# Allegro board MOTION_DETECTOR.brd
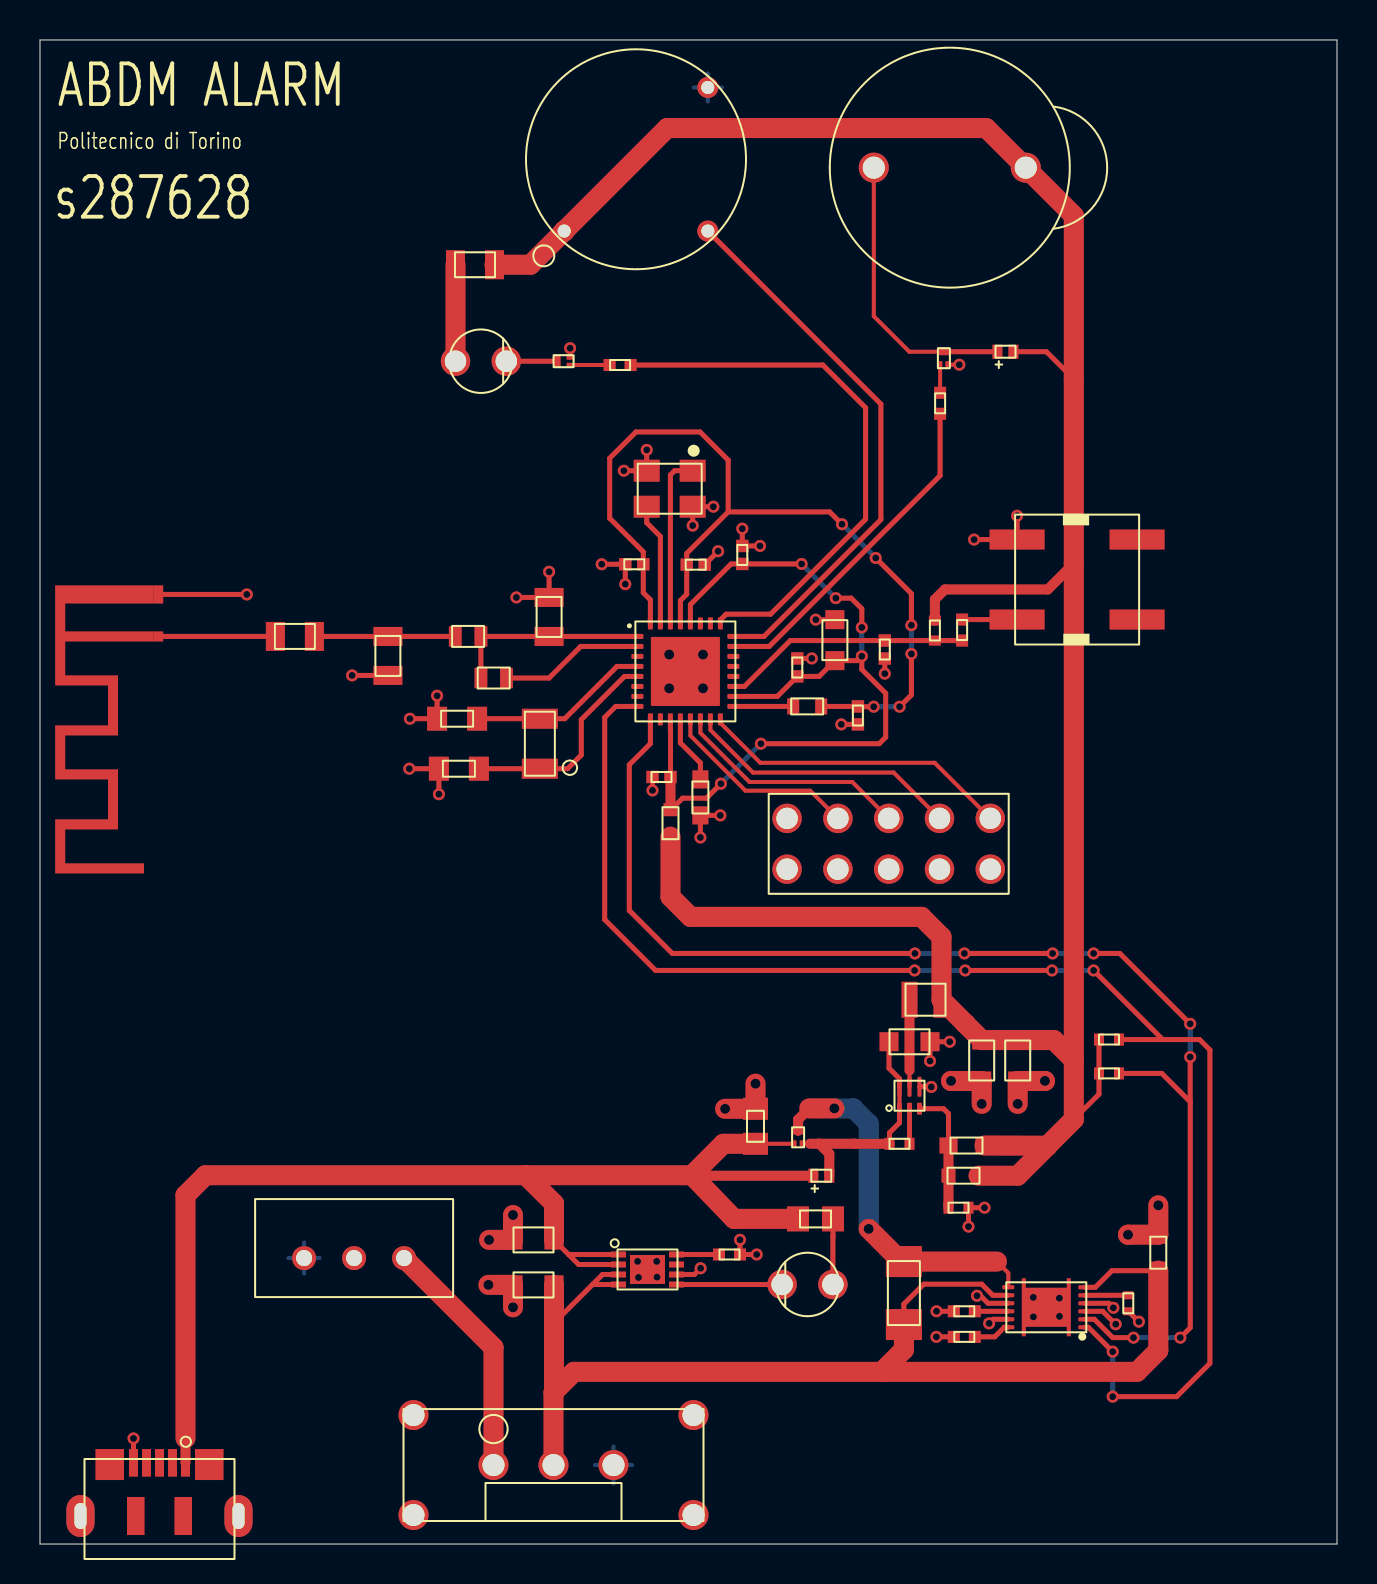
[diagram p0: board, top side]
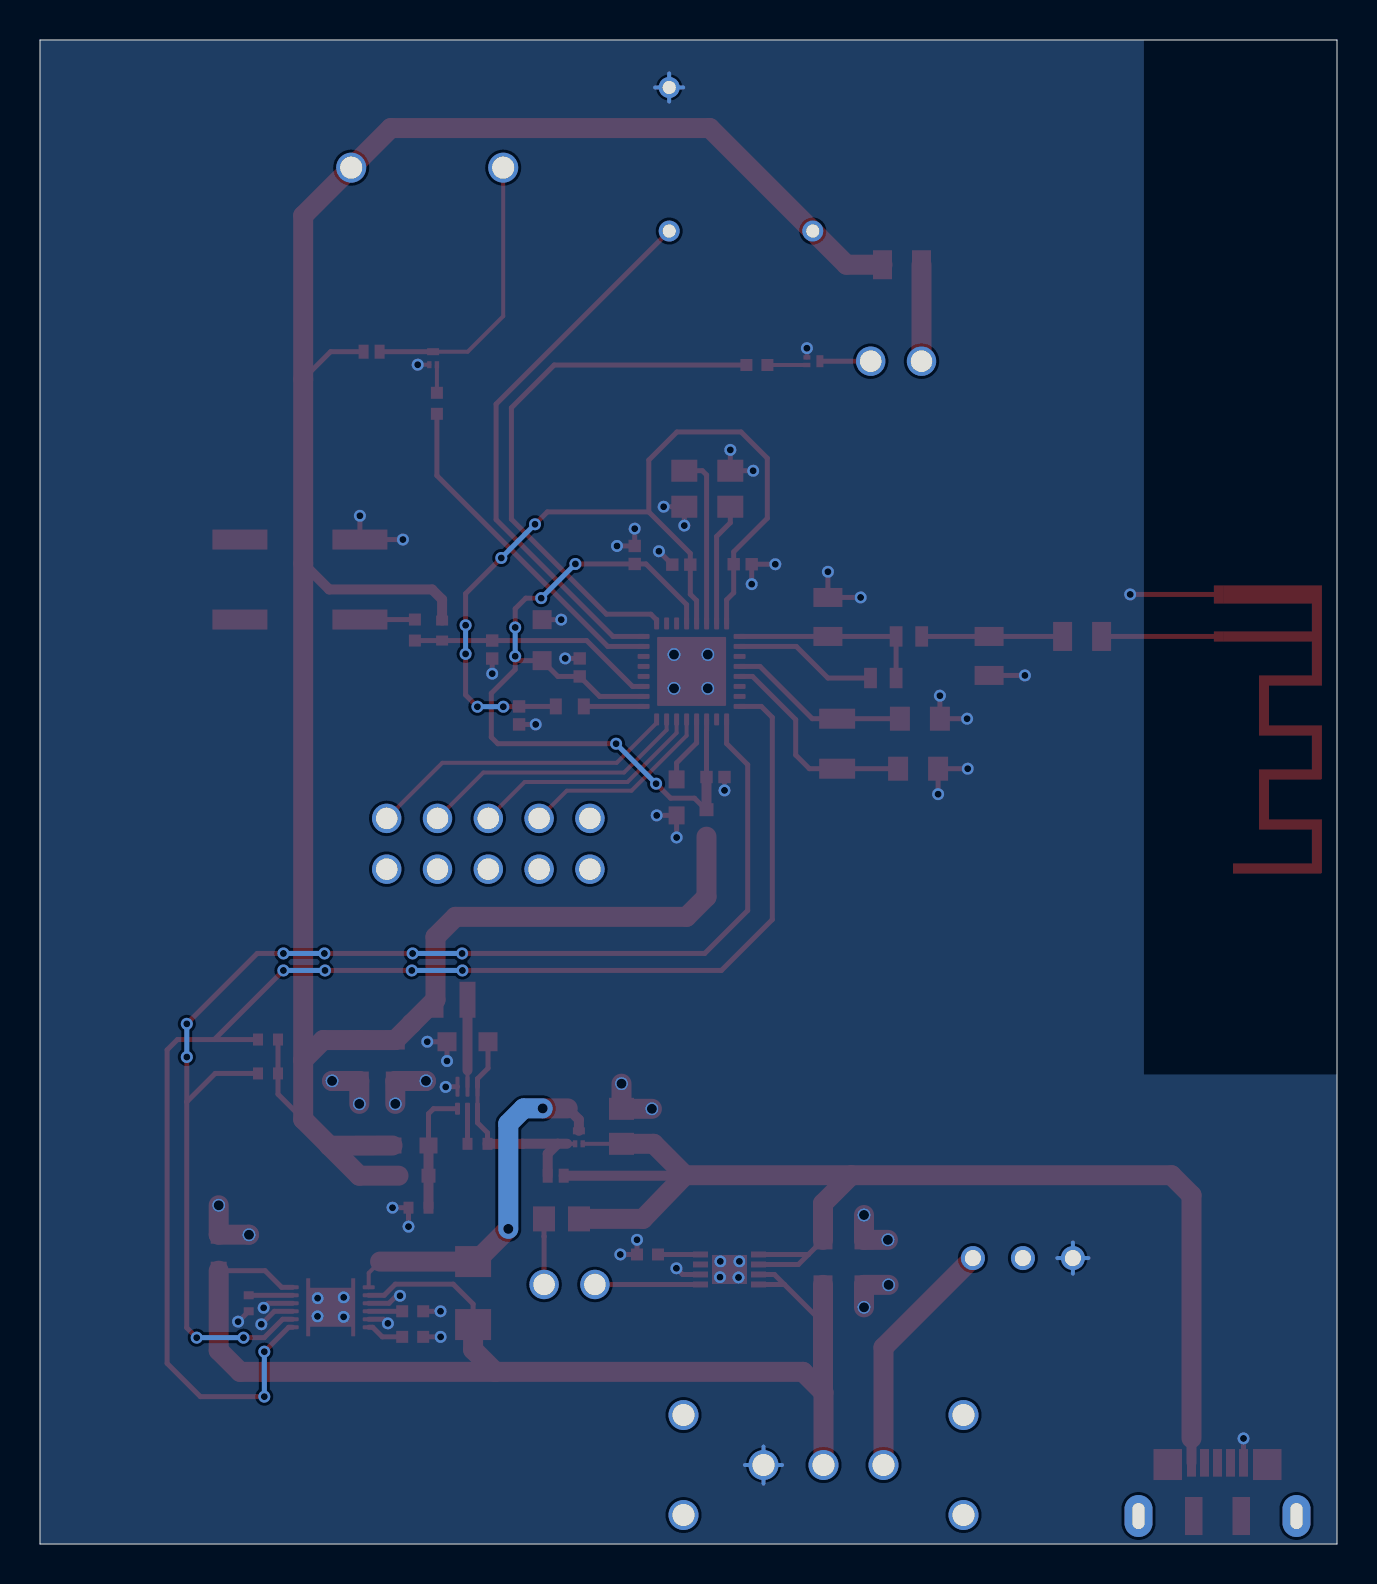
[diagram p1: board, bottom side, seen from below]

Outline 64.85 x 75.22 mm; copper layers: TOP, BOTTOM. Coordinates in mm from the lower left corner of the outline.
Outline path: 0,75.22 64.85,75.22 64.85,0 0,0 0,75.22

## Design rules (mm)
constraint set DEFAULT: 

## Placement (name value [footprint] x y rotation side)
C1  C_4.7uF  [GRM21BR71A475ME51K]  24.68 15.21 0 top
C2  C_4.7uF  [GRM21BR71A475ME51K]  24.68 12.96 0 top
C3  C_470nF  [GRM155R61A474ME15D]  54.41 12.04 90 top
C4  C_1uF  [CC0603KRX5R5BB105]  55.91 14.57 270 top
C5  C_12pF_highQ  [VJ0402D120GXCAJ]  12.75 45.39 180 top
C6  C_1200pF_highQ  [VJ0805D122KXXAJ]  25.46 46.37 270 top
C7  C_1200pF_highQ  [VJ0805D122KXXAJ]  17.39 44.41 90 top
C8  C_12pF  [GRM1885C1H120JA01J]  20.95 38.77 0 top
C9  C_12pF  [GRM1885C1H120JA01J]  20.86 41.27 0 top
C10  C_1uF  [CC0603KRX5R5BB105]  33.02 37.34 90 top
C11  C_100nF  [C0402C104M8RAC7411]  31.07 38.36 0 top
C12  C_100nF  [C0402C104M8RAC7411]  35.11 49.47 270 top
C13  C_10uF  [GRM21BR71A106MA73K]  39.75 45.2 270 top
C14  C_100nF  [C0402C104M8RAC7411]  37.86 43.84 270 top
C15  C_100nF  [C0402C104M8RAC7411]  40.89 41.44 90 top
C16  C_100nF  [C0402C104M8RAC7411]  32.78 48.98 180 top
C17  C_100nF  [C0402C104M8RAC7411]  29.71 49 0 top
C18  C_100nF  [C0402C104M8RAC7411]  42.24 44.73 90 top
C19  C_10uF  [GRM21BR71A106MA73K]  47.08 24.18 90 top
C20  C_10uF  [GRM21BR71A106MA73K]  48.89 24.18 90 top
C21  C_120pF  [CL10C121JB8NNNC]  46.17 18.42 0 top
C22  C_4.7uF  [GRM21BR71A475ME51K]  43.47 25.12 180 top
D1  LED_R_1.7mV_1mA  [HLMPK150]  38.38 12.98 180 top
D2  Schottky_BAT32LSQYL  [BAT32LSQYL]  39.06 18.42 0 top
D3  Diode_BAS16LD315  [BAS16LD315]  48.27 59.63 0 top
D4  LED_R_1.7mV_1mA  [HLMPK150]  22.04 59.16 0 top
FL1  Ferrite_BLM18HE152SN1  [BLM18HE152SN1D]  31.53 36.05 90 top
L1  L_15nH_highQ  [IMC0603ER15NJ01]  22.68 43.31 180 top
L2  L_2nH_highQ  [IMC0603ER2N0S01]  21.41 45.39 180 top
L3  L_10uH  [MLF1608E100MTD00]  38.36 41.89 0 top
L4  L_470nH  [DFE201610E]  44.28 27.22 0 top
M1  nMOS_SSM3K16CTL3F  [SSM3K16CT]  37.91 20.34 180 top
M2  nMOS_SSM3K16CTL3F  [SSM3K16CT]  45.2 59.3 180 top
M3  nMOS_SSM3K16CTL3F  [SSM3K16CT]  26.18 59.16 270 top
R1  R_3300_1%  [CRCW06033K30FKEA]  38.78 16.26 180 top
R2  R_1k_5%  [CRCW04021K00JNED]  34.47 14.48 180 top
R3  R_10m_1%  [MFSA1206R0100FCM]  43.2 12.55 270 top
R4  R_5k_1%  [RC0402FR075KL]  53.45 25.23 180 top
R5  R_5k_1%  [RC0402FR075KL]  53.45 23.54 180 top
R6  R_100k_5%  [CRCW0603100KJNEA]  35.78 20.89 270 top
R7  R_1M_1%  [CRCW04021M00FKEE]  46.22 10.36 180 top
R8  R_1M_1%  [CRCW04021M00FKEE]  46.22 11.64 0 top
R9  R_1600_5%  [CRCW08051K60JNEA]  21.75 63.98 0 top
R10  R_50k_1%  [CRCW040250K0FKED]  29 58.96 180 top
R11  R_50k_1%  [CRCW040250K0FKED]  45 57.05 90 top
R12  R_100k_5%  [RT0402FRE07100KL]  44.75 45.69 90 top
R13  R_1k_5%  [CRCW04021K00JNED]  46.11 45.71 270 top
R14  R_453k_0.1%  [RT0603BRD07453KL]  46.33 19.93 0 top
R15  R_100k_1%  [RT0402FRE07100KL]  42.97 20.02 180 top
R16  R_100k_1%  [RT0402FRE07100KL]  45.92 16.82 180 top
SW1  SW_SK12F17G7  [SK12F17G7]  25.68 3.95 0 top
U1  MicroUSB_1051640001  [1051640001]  5.98 1.75 180 top
U2  BatCharger_MCP73832T2ATIMC  [MCP73832T2ATIMC]  30.38 13.73 0 top
U3  CON3_22035035  [22035035]  15.71 14.3 0 top
U4  BatteryGauge_BQ27411DRZTG1A  [BQ27411DRZTG1A]  50.31 11.84 180 top
U5  uC_CC2640F128RHBR  [FOOTPRINT_CC2640F128RHBR]  32.27 43.64 90 top
U6  patch_antenna_50ohm  [PATCH_ANTENNA_50OHM]  5.66 48.44 90 top
U7  Buzzer_AI1223TWT3V2R  [AI1223TWT3V2R]  45.49 68.83 270 top
U8  CON10_M209720546  [M209720546]  42.44 35.02 0 top
U9  pushbutton_EVPBV2C3L000  [EVPBV2C3L000]  51.86 48.23 180 top
U10  PIR_EKMC1607112  [EKMC1607112]  29.8 69.25 90 top
U11  Buck_TPS62824DMQR  [TPS62824DMQR]  43.47 22.42 90 top
Y1  XTAL_32768_SC32S7PF20PPM  [SC32S7PF20PPM]  24.99 40.02 90 top
Y2  XTAL_24M_ECS240833AGNTR3  [ECS240833AGNTR]  31.49 52.78 180 top

## Library data of the parts
C1 C2 C22 = C_4700nF_GRM21BR71A475ME51K
C3 = C_470nF_GRM155R61A474ME15D
C4 C10 = C_1uF_CC0603KRX5R5BB105
C5 = C_12pF_VJ0402D120GXCAJ_highQ
C6 C7 = C_1200pF_VJ0805D122KXXAJ_highQ
C8 C9 = C_12pF_GRM1885C1H120JA01J
C11 C12 C14-C18 = C_100nF_C0402C104M8RAC7411
C13 C19 C20 = C_10uF_GRM21BR71A106MA73K
C21 = C_120pF_CL10C121JB8NNNC
D1 D4 = LED_R_HLMPK150
D2 = Schottky_BAT32LSQYL
D3 = Diode_BAS16LD315
FL1 = Ferrite_BLM18HE152SN1
L1 = L_15nH_IMC0603ER15NJ01_highQ
L2 = L_2nH_IMC0603ER2N0S01_highQ
L3 = L_10uH_MLF1608E100MTD00
L4 = L_470nH_DFE201610ER47M
M1-M3 = nMOS_SSM3K16CTL3F
R1 = R_3300_1%_CRCW06033K30FKEA
R2 R13 = R_1k_5%_CRCW04021K00JNED
R3 = R_10m_1%_MFSA1206R0100FCM
R4 R5 = R_5k_1%_RC0402FR075KL
R6 R12 = R_100k_5%_CRCW0603100KJNEA
R7 R8 = R_1M_1%_CRCW04021M00FKEE
R9 = R_1600_5%_CRCW08051K60JNEA
R10 R11 = R_50k_1%_CRCW040250K0FKED
R14 = R_453k_RT0603BRD07453KL
R15 R16 = R_100k_1%_RT0402FRE07100KL
SW1 = SW_SK12F17G7
U1 = MicroUSB_1051640001
U2 = BatteryCharger_MCP73832T2ATIMC
U3 = CON3_22035035
U4 = BatteryGauge_BQ27411DRZTG1A
U5 = uC_CC2640F128RHBR
U6 = patch_antenna_50ohm
U7 = Buzzer_AI1223TWT3V2R
U8 = CON10_M209720546
U9 = Pushbutton_EVPBV2C3L000
U10 = PIRsensor_EKMC1607112
U11 = Buck_TPS62824DMQR
Y1 = XTAL_32768_SC32S7PF20PPM
Y2 = XTAL_24M_ECS240833AGNTR3

## Footprints (pads in the part's own frame, mm; a bottom-side part is the same pattern mirrored in y, then rotated)
22035035
  round 1.2 hole 0.8: 1(-2.5,0) 2(0,0) 3(2.5,0)
1051640001
  rect 0.45x1.38 smd: 1(-1.3,-2.31) 2(-0.65,-2.31) 3(0,-2.31) 4(0.65,-2.31) 5(1.3,-2.31)
  oval 1.4x2.1 hole 0.6x1.3: 6(-3.95,0.35) 7(3.95,0.35)
  rect 1.425x1.55 smd: 8(-2.487,-2.225) 9(2.487,-2.225)
  rect 0.875x1.9 smd: 10(-1.188,0.35) 11(1.188,0.35)
AI1223TWT3V2R
  round 1.5 hole 1.1: 1(0,3.8) 2(0,-3.8)
BAS16LD315
  rect 0.5x0.7 smd: 1(-0.4,0) 2(0.4,0)
BAT32LSQYL
  rect 0.5x0.7 smd: 1(-0.4,0) 2(0.4,0)
BLM18HE152SN1D
  rect 0.65x0.7 smd: 1(-0.675,0) 2(0.675,0)
BQ27411DRZTG1A
  rrect 0.6x0.2 smd: 1(-1.9,1) 2(-1.9,0.6) 3(-1.9,0.2) 4(-1.9,-0.2) 5(-1.9,-0.6) 6(-1.9,-1) 7(1.9,-1) 8(1.9,-0.6) 9(1.9,-0.2) 10(1.9,0.2) 11(1.9,0.6) 12(1.9,1)
  custom 2.45x2.9 smd: 13(0,0)
C0402C104M8RAC7411
  rect 0.62x0.62 smd: 1(-0.45,0) 2(0.45,0)
CC0603KRX5R5BB105
  rect 0.9x0.8 smd: 1(-0.9,0) 2(0.9,0)
CL10C121JB8NNNC
  rect 0.7x0.7 smd: 1(-0.75,0) 2(0.75,0)
CRCW04021K00JNED
  rect 0.6x0.6 smd: 1(-0.525,0) 2(0.525,0)
CRCW04021M00FKEE
  rect 0.6x0.6 smd: 1(-0.525,0) 2(0.525,0)
CRCW06033K30FKEA
  rect 1.1x1.25 smd: 1(-0.875,0) 2(0.875,0)
CRCW08051K60JNEA
  rect 0.95x1.45 smd: 1(-0.975,0) 2(0.975,0)
CRCW040250K0FKED
  rect 0.6x0.6 smd: 1(-0.525,0) 2(0.525,0)
CRCW0603100KJNEA
  rect 1.1x1.25 smd: 1(-0.875,0) 2(0.875,0)
DFE201610E
  rect 0.8x1.8 smd: 1(-0.8,0) 2(0.8,0)
ECS240833AGNTR
  rect 1.3x1.1 smd: 1(-1.15,-0.9) 2(1.15,-0.9) 3(1.15,0.9) 4(-1.15,0.9)
EKMC1607112
  round 1.05 hole 0.65: 1(-3.59,3.59) 2(-3.59,-3.59) 3(3.59,-3.59)
EVPBV2C3L000
  rect 2.75x1 smd: 1(-3,2) 2(3,2) 3(-3,-2) 4(3,-2)
FOOTPRINT_CC2640F128RHBR
  rrect 0.25x0.6 smd: 1(1.75,2.4) 2(1.25,2.4) 3(0.75,2.4) 4(0.25,2.4) 5(-0.25,2.4) 6(-0.75,2.4) 7(-1.25,2.4) 8(-1.75,2.4) 17(-1.75,-2.4) 18(-1.25,-2.4) 19(-0.75,-2.4) 20(-0.25,-2.4) 21(0.25,-2.4) 22(0.75,-2.4) 23(1.25,-2.4) 24(1.75,-2.4)
  rrect 0.6x0.25 smd: 9(-2.4,1.75) 10(-2.4,1.25) 11(-2.4,0.75) 12(-2.4,0.25) 13(-2.4,-0.25) 14(-2.4,-0.75) 15(-2.4,-1.25) 16(-2.4,-1.75) 25(2.4,-1.75) 26(2.4,-1.25) 27(2.4,-0.75) 28(2.4,-0.25) 29(2.4,0.25) 30(2.4,0.75) 31(2.4,1.25) 32(2.4,1.75)
  rrect 3.45x3.45 smd: 33(0,0)
GRM21BR71A106MA73K
  rect 0.95x0.95 smd: 1(-1.025,0) 2(1.025,0)
GRM21BR71A475ME51K
  rect 0.95x0.95 smd: 1(-1.025,0) 2(1.025,0)
GRM155R61A474ME15D
  rect 0.4x0.5 smd: 1(-0.4,0) 2(0.4,0)
GRM1885C1H120JA01J
  rect 1x1.2 smd: 1(-1,0) 2(1,0)
HLMPK150
  round 1.47 hole 1.07: 1(-1.27,0) 2(1.27,0)
IMC0603ER2N0S01
  rect 0.64x1.02 smd: 1(-0.64,0) 2(0.64,0)
IMC0603ER15NJ01
  rect 0.64x1.02 smd: 1(-0.64,0) 2(0.64,0)
M209720546
  round 1.47 hole 1.07: 1(-5.08,1.27) 2(-2.54,1.27) 3(0,1.27) 4(2.54,1.27) 5(5.08,1.27) 6(-5.08,-1.27) 7(-2.54,-1.27) 8(0,-1.27) 9(2.54,-1.27) 10(5.08,-1.27)
MCP73832T2ATIMC
  rect 0.75x0.3 smd: 1(-1.45,0.75) 2(-1.45,0.25) 3(-1.45,-0.25) 4(-1.45,-0.75) 5(1.45,-0.75) 6(1.45,-0.25) 7(1.45,0.25) 8(1.45,0.75)
  rect 1.75x1.45 smd: 9(0,0)
MFSA1206R0100FCM
  rect 1.55x1.8 smd: 1(-1.575,0) 2(1.575,0)
MLF1608E100MTD00
  rect 0.6x0.8 smd: 1(-0.7,0) 2(0.7,0)
PATCH_ANTENNA_50OHM
  rect 0.9x0.5 smd: 1(-0.95,-0.25)
  rect 0.5x0.5 smd: 2(-3.05,-0.25)
RC0402FR075KL
  rect 0.5x0.6 smd: 1(-0.5,0) 2(0.5,0)
RT0402FRE07100KL
  rect 0.5x0.6 smd: 1(-0.5,0) 2(0.5,0)
RT0603BRD07453KL
  rect 0.9x0.8 smd: 1(-0.9,0) 2(0.9,0)
SC32S7PF20PPM
  rect 1x1.8 smd: 1(-1.25,0) 2(1.25,0)
SK12F17G7
  round 1.5 hole 1.1: 1(-3,0) 2(0,0) 3(3,0) 4(-7,2.5) 5(7,2.5) 6(-7,-2.5) 7(7,-2.5)
SSM3K16CT
  rect 0.22x0.35 smd: 1(0.19,0.325) 2(-0.19,0.325)
  rect 0.6x0.35 smd: 3(0,-0.325)
TPS62824DMQR
  rrect 0.6x0.25 smd: 1(-0.65,0.5) 2(-0.65,0) 3(-0.65,-0.5)
  rrect 1x0.2 smd: 4(0.45,-0.5) 5(0.45,0) 6(0.45,0.5)
VJ0402D120GXCAJ
  rect 0.95x1.45 smd: 1(-0.975,0) 2(0.975,0)
VJ0805D122KXXAJ
  rect 0.95x1.45 smd: 1(-0.975,0) 2(0.975,0)

## Nets
3.3V: C19.2 C20.2 C21.2 D3.2(C) FL1.1 L4.2 R4.2 R5.2 R9.2 R12.2 R14.2 U7.1(P) U10.1(VDD)
GND: C1.1 C2.1 C3.1 C4.1 C6.1 C7.1 C8.1 C9.1 C10.1 C11.1 C12.1 C13.1 C14.1 C15.1 C16.1 C17.1 C18.1 C19.1 C20.1 C22.1 M2.2 M3.2 R2.1 R6.1 R7.2 R8.1 R16.1 SW1.3 U1.5 U2.6(VSS) U2.9 U3.1 U4.3(VSS) U4.4 U4.9 U4.11 U4.13 U5.33 U6.1(GND) U9.4 U10.3 U11.4 Y2.2 Y2.4
VBAT: M1.3(S) R3.1 U4.7
VBAT_RAW: C2.2 C4.2 R3.2 SW1.2 U2.3 U2.4 U4.6 U4.8
VDDR: C15.2 C16.2 C17.2 L3.2 U5.29 U5.32
VDDS: C11.2 C12.2 C13.2 C14.2 FL1.2 U5.11 U5.18 U5.28
ANT_FEED: C5.1 C7.2 L2.2
ANTENNA: C5.2 U6.2
BAT_STAT: D1.2(C) U2.5
BATTERY: SW1.1(P) U3.3
BCK_FB: C21.1 R14.1 R16.2 U11.3
BCK_PG: R15.1 U11.2
BCK_SW: L4.1 U11.5
BUZ: R11.1 U5.23
BUZZ_DRV_MOSDRAIN: D3.1 M2.3(S) U7.2
BUZZ_DRV_MOSGATE: M2.1 R11.2
CRG_PROG: R2.2 U2.8
DCDC_SW: L3.1 U5.17
DCOUPL: C10.2 U5.12
FG_SCK: R5.1 U4.2 U5.9
FG_SDA: R4.1 U4.1 U5.8
JTAG_TCKC: U5.14 U8.3
JTAG_TDI: U5.16 U8.5
JTAG_TDO: U5.15 U8.4
JTAG_TMSC: U5.13 U8.2
ONOFF_LED: R10.1 U5.25
ONOFFLED_DRV_DRAIN: D4.2(C) M3.3(S)
ONOFFLED_DRV_GATE: M3.1 R10.2
ONOFFLED_DRV_RES: D4.1 R9.1
PIR: U5.24 U10.2
RF_N: L1.1 U5.2
RF_P: C6.2 L1.2 L2.1 U5.1
RSTN: C18.2 R12.1 R13.2 U5.19
V_SOURCE: C22.2 D2.2 M1.2 R15.2 U11.1 U11.6(VIN)
VUSB: C1.2 D2.1 M1.1 R1.2 R6.2 U1.1(VDD_USB) U2.1 U2.2
X24M_N: U5.30 Y2.1
X24M_P: U5.31 Y2.3(OUT_IN)
X32K_Q1: C9.2 U5.4 Y1.2
X32K_Q2: C8.2 U5.5(X32K_Q2) Y1.1
N18214: D1.1 R1.1
N23265: R7.1 U4.12
N23278: C3.2 U4.5
N46613: R13.1 U9.2(B2)
N59465: R8.2 U4.10

Pads without a net: SW1 4 5 6 7; U1 2 3 4 6 7 8 9 10 11; U2 7; U3 2; U5 3 6 7 10 20 21 22 26 27; U8 1 6 7 8 9 10; U9 1 3

## Via types
v1: diameter 0.6, hole 0.35, TOP to BOTTOM, 78 vias
v2: diameter 0.65, hole 0.5, TOP to BOTTOM, 18 vias

## Routing (per net, layer and track width the routed paths; a pad name or vN(x,y) marks a point on that pad's centre or on a via; arc(x,y) is an arc through that point)
3.3V: length 133.2
  TOP w0.25: 51.69,21.24 52.95,22.5 R5.2 R4.2 ; 51.69,58.26 50.32,59.63 D3.2
  TOP w0.5: 51.69,49.04 50.39,47.74 45.25,47.74 44.75,47.24 R12.2
  TOP w1: C21.2 48.89,18.42 50.39,19.92 ; 51.69,24.2 50.69,25.2 C20.2 C19.2 46.28,26.02 46.28,26.02 L4.2 45.08,30.37 44.08,31.37 32.53,31.37 31.53,32.37 31.53,35.38 ; 51.69,24.2 51.69,21.24 50.39,19.93 50.39,19.92 ; 51.69,24.2 51.69,66.43 U7.1 47.31,70.81 31.36,70.81 U10.1 24.53,63.98 R9.2 ; 50.39,19.92 R14.2
GND: length 76.3
  TOP w0.2: M2.2 v1(45.97,58.98) ; M3.2 v1(26.5,59.8)
  TOP w0.25: v1(19.86,42.43) C9.1 v1(18.5,41.27) ; v1(53.67,11.81) 53.44,12.04 U4.4 ; U4.3 53.13,11.64 53.78,10.99 v1(53.78,10.99) ; v1(47.22,16.82) R16.1 v1(46.42,15.87) ; v1(35,15.21) R2.1 v1(35.83,14.48) ; U2.6 32.72,13.48 v1(33.03,13.79) ; v1(23.82,47.34) C6.1 v1(25.46,48.62) ; v1(44.5,24.16) C22.1 v1(45.49,25.12) ; C7.1 v1(15.61,43.44) ; U4.9 47.4,12.04 47.03,12.42 v1(46.85,12.42) ; v1(30.33,54.72) Y2.2 v1(29.19,53.68) ; R8.1 v1(44.83,11.64) ; C16.1 v1(33.91,49.65) ; v1(28.08,49) C17.1 v1(29.27,48.01) ; C14.1 v1(38.59,44.29) ; U6.1 v1(10.34,47.49) ; v1(47.46,11.03) 47.66,11.24 U4.11 ; R7.2 v1(44.82,10.36) ; v1(48.86,51.43) U9.4 v1(46.7,50.23) ; v1(33.67,51.88) Y2.4 v1(32.64,50.94) ; v1(34.02,36.44) C10.1 v1(33.02,35.34) ; C13.1 v1(38.79,46.23) ; U11.4 44.56,22.87 v1(44.56,22.86) ; v1(54.94,11.12) 54.94,11.12 C3.1 ; 42.24,44.29 v1(42.24,43.53) ; v1(36,49.91) 35.11,49.91 v1(35.11,50.78) ; C15.1 v1(40.06,40.99) ; U1.5 v1(4.68,5.28) ; v1(19.95,37.5) C8.1 v1(18.46,38.77) ; C11.1 v1(30.63,37.69)
  TOP w1: v2(35.78,23.02) R6.1 v2(34.25,21.77) ; v2(23.65,11.84) C2.1 v2(22.42,12.96) ; v2(54.4,15.47) 54.41,15.47 C4.1 v2(55.91,16.94) ; v2(45.55,23.16) 45.56,23.16 C19.1 v2(47.08,22.01) ; v2(23.65,16.45) C1.1 v2(22.45,15.21) ; v2(50.25,23.16) 50.24,23.16 C20.1 v2(48.89,22.01)
  BOTTOM w0.2: 27.75,3.95 SW1.3 ; SW1.3 29.6,3.95 ; SW1.3 28.68,4.88 ; SW1.3 28.68,3.02 ; U3.1 13.98,14.3 ; U3.1 13.21,15.08 ; U3.1 12.43,14.3 ; U3.1 13.21,13.52 ; U10.3 33.39,73.55 ; U10.3 33.39,72.14 ; U10.3 32.69,72.84 ; U10.3 34.09,72.84
  vias: v1(29.88,14.13) v1(29.93,13.33) v1(30.83,14.13) v1(30.85,13.35) v1(49.67,12.33) v1(49.67,11.36) v1(50.97,12.29) v1(50.97,11.38) v2(31.46,44.48) v2(31.46,42.79) v2(33.15,44.48) v2(33.15,42.79)
VBAT: length 18.5
  TOP w0.2: 47.84,14.12 48.42,13.55 U4.7
  TOP w0.5: 37.91,20.66 37.91,21.23 38.47,21.79
  TOP w1: 38.47,21.79 v2(39.72,21.79) ; 47.84,14.12 R3.1 43.07,14.12 v2(41.43,15.76)
  BOTTOM w1: v2(39.72,21.79) 40.67,21.79 41.43,21.02 v2(41.43,15.76)
VBAT_RAW: length 63.4
  TOP w0.25: 27.63,12.98 28.13,13.48 U2.3 ; 27.63,12.98 U2.4 ; 27.63,12.98 25.7,11.05 ; U4.8 47.64,12.44 47.08,12.99 44.19,12.99 43.2,12 R3.2 ; U4.6 52.77,12.84 53.6,13.67 C4.2
  TOP w1: 25.7,7.61 C2.2 ; 25.7,7.61 25.68,7.58 SW1.2 ; 25.7,7.61 26.7,8.61 42.08,8.61 ; 42.08,8.61 43.2,9.72 R3.2 ; 42.08,8.61 54.84,8.61 55.91,9.68 C4.2
VDDR: length 46
  TOP w0.25: v1(40.1,51) 39.48,51.62 34.41,51.62 ; 34.41,51.62 32.33,49.54 C16.2 32.33,47.5 32.02,47.19 U5.29 ; 34.41,51.62 34.41,54.21 33,55.62 29.79,55.62 28.49,54.3 28.49,51.3 30.17,49.62 C17.2 30.17,47.58 30.52,47.22 U5.32 ; v1(41.78,49.32) 43.57,47.53 v1(43.57,45.95) ; v1(41.69,41.88) 40.91,41.88 C15.2 39.06,41.89 ; v1(43.57,44.52) 43.57,42.47 v1(42.98,41.88)
  BOTTOM w0.25: v1(42.98,41.88) v1(41.69,41.88) ; v1(43.57,45.95) v1(43.57,44.52) ; v1(40.1,51) v1(41.78,49.32)
VDDS: length 42.2
  TOP w0.25: v1(36.05,40.02) 41.96,40.02 42.28,40.35 42.28,42.55 41.09,43.74 v1(41.09,44.4) 40.87,44.18 C13.2 38.95,43.39 C14.2 36.86,42.39 U5.18 ; v1(34.05,38.02) 33.32,37.3 32.12,37.3 31.55,36.73 FL1.2 ; U5.28 32.52,46.98 34.55,49.02 C12.2 v1(38.08,49.02) ; v1(41.09,45.84) 41.09,46.77 40.56,47.3 v1(39.79,47.3) ; C11.2 31.53,40.68 31.52,40.69 U5.11
  TOP w0.5: FL1.2 C11.2
  BOTTOM w0.25: v1(38.08,49.02) v1(39.79,47.3) ; v1(41.09,45.84) v1(41.09,44.4) ; v1(36.05,40.02) v1(34.05,38.02)
ANT_FEED: length 7
  TOP w0.25: L2.2 C7.2 C5.1
ANTENNA: length 5.9
  TOP w0.25: C5.2 U6.2
BAT_STAT: length 5.3
  TOP w0.25: D1.2 U2.5
BATTERY: length 12.2
  TOP w1: SW1.1 22.68,9.83 U3.3
BCK_FB: length 6.3
  TOP w0.25: U11.3 45.17,21.77 45.42,21.52 R14.1
  TOP w0.5: R16.2 C21.1 R14.1
BCK_PG: length 1.8
  TOP w0.25: U11.2 R15.1
BCK_SW: length 4.3
  TOP w0.2: U11.5 43.47,23.69
  TOP w0.5: 43.47,23.69 L4.1
BUZ: length 17
  TOP w0.25: R11.1 45,53.44 36.46,44.89 U5.23
BUZZ_DRV_MOSDRAIN: length 14.3
  TOP w0.2: M2.3 43.47,59.63 41.69,61.41 U7.2
  TOP w0.25: D3.1 M2.3
BUZZ_DRV_MOSGATE: length 1.4
  TOP w0.2: M2.1 45,57.57
CRG_PROG: length 2.1
  TOP w0.25: U2.8 R2.2
DCDC_SW: length 3
  TOP w0.25: U5.17 L3.1
DCOUPL: length 3.4
  TOP w0.25: U5.12 32.02,40.07 33.02,39.07 C10.2
FG_SCK: length 65.6
  TOP w0.25: v1(43.75,29.54) 31.61,29.54 29.46,31.69 29.46,38.98 30.52,40.03 U5.9 ; v1(50.63,29.54) v1(46.22,29.54) ; 57.51,22.12 56.09,23.54 R5.1 ; 57.51,22.12 57.51,22.11 57.51,10.82 v1(57.02,10.32) ; 57.51,22.12 v1(57.51,24.36) ; v1(52.68,29.54) 53.99,29.54 v1(57.51,26.02) ; U4.2 52.72,11.24 53.64,10.32 v1(54.67,10.32)
  BOTTOM w0.25: v1(57.02,10.32) v1(54.67,10.32) ; v1(57.51,24.36) v1(57.51,26.02) ; v1(52.68,29.54) v1(50.63,29.54) ; v1(46.22,29.54) v1(43.75,29.54)
FG_SDA: length 72.5
  TOP w0.25: U4.1 52.42,10.84 v1(53.64,9.62) ; v1(52.68,28.69) 56.13,25.23 ; 56.13,25.23 57.98,25.23 58.49,24.71 58.49,9.03 56.83,7.37 v1(53.64,7.37) ; 56.13,25.23 R4.1 ; v1(50.6,28.69) v1(46.26,28.69) ; v1(43.73,28.69) 30.78,28.69 28.24,31.23 28.24,41.34 28.79,41.89 U5.8
  BOTTOM w0.25: v1(53.64,9.62) v1(53.64,7.37) ; v1(46.26,28.69) v1(43.73,28.69) ; v1(52.68,28.69) v1(50.6,28.69)
JTAG_TCKC: length 11.9
  TOP w0.2: U8.3 40.61,38.11 35.47,38.11 33.02,40.57 U5.14
JTAG_TDI: length 15.6
  TOP w0.2: U5.16 34.02,41.07 36.02,39.07 44.73,39.07 U8.5
JTAG_TDO: length 13.8
  TOP w0.2: U5.15 33.52,40.71 35.65,38.59 42.68,38.59 U8.4
JTAG_TMSC: length 9.9
  TOP w0.2: U5.13 32.52,40.43 35.28,37.68 38.51,37.68 U8.2
ONOFF_LED: length 27.7
  TOP w0.25: U5.25 34.02,46.22 34.31,46.5 36.53,46.5 41.28,51.26 41.28,56.82 39.14,58.96 R10.1
ONOFFLED_DRV_DRAIN: length 2.5
  TOP w0.25: M3.3 D4.2
ONOFFLED_DRV_GATE: length 2
  TOP w0.2: M3.1 R10.2
ONOFFLED_DRV_RES: length 4.8
  TOP w1: R9.1 D4.1
PIR: length 27.8
  TOP w0.25: U10.2 42.05,57.01 42.05,51.23 36.2,45.39 U5.24
RF_N: length 7.2
  TOP w0.25: L1.1 25.46,43.31 27.04,44.89 U5.2
RF_P: length 9.9
  TOP w0.25: U5.1 C6.2 L2.1 L1.2
RSTN: length 12.4
  TOP w0.25: R13.2 R12.1 C18.2 37.52,45.19 35.22,42.89 U5.19
V_SOURCE: length 11.7
  TOP w0.2: 38.5,20.02 38.49,20.02 M1.2 ; U11.6 U11.1
  TOP w0.25: R15.2 42.47,20.57 42.97,21.07 U11.1 ; U11.6 42.97,23.27 42.45,23.8 C22.2
  TOP w0.5: 38.5,20.02 38.97,20.02 ; 38.97,20.02 39.47,19.52 D2.2 ; 38.97,20.02 40.72,20.02 40.72,20.02 R15.2
VUSB: length 67.2
  TOP w0.2: M1.1 R6.2
  TOP w0.25: C1.2 26.43,14.48 ; 26.43,14.48 26.93,13.98 U2.2 ; 26.43,14.48 26.44,14.48 U2.1
  TOP w0.5: D2.1 32.62,18.42 32.6,18.44 ; U1.1 7.28,5.29
  TOP w1: R1.2 34.7,16.26 32.6,18.44 ; R6.2 34.17,20.02 32.6,18.44 ; 32.6,18.44 24.29,18.44 ; C1.2 25.7,17.03 24.29,18.44 ; 24.29,18.44 8.28,18.44 7.28,17.44 7.28,5.29
X24M_N: length 8.6
  TOP w0.25: U5.30 31.52,53.46 31.73,53.68 Y2.1
X24M_P: length 6.1
  TOP w0.25: U5.31 31.02,50.39 30.33,51.08 Y2.3
X32K_Q1: length 9.1
  TOP w0.25: U5.4 28.85,43.89 26.24,41.27 Y1.2 C9.2
X32K_Q2: length 10.9
  TOP w0.25: C8.2 Y1.1 26.38,38.77 27.07,39.46 27.07,41.23 29.22,43.39 U5.5
N18214: length 3.3
  TOP w0.25: R1.1 39.65,15.38 39.64,15.38 D1.1
N23265: length 1.9
  TOP w0.25: U4.12 48.22,10.84 47.73,10.36 R7.1
N23278: length 2.2
  TOP w0.25: C3.2 U4.5
N46613: length 2.8
  TOP w0.25: U9.2 R13.1
N59465: length 1.7
  TOP w0.25: R8.2 U4.10

## Copper pours and planes (outline as drawn; the poured copper is in the pictures)
GND on BOTTOM: 0,0 0,23.49 9.66,23.49 9.66,75.22 64.85,75.22 64.85,0
ANTENNA on TOP (solid shape): 5.66,47.04 1.26,47.04 1.26,45.64 5.66,45.64 5.66,45.14 1.26,45.14 1.26,43.44 3.9,43.44 3.9,40.44 1.26,40.44 1.26,38.74 3.9,38.74 3.9,35.74 1.26,35.74 1.26,34.04 5.2,34.04 5.2,33.54 0.76,33.54 0.76,36.24 3.4,36.24 3.4,38.24 0.76,38.24 0.76,40.94 3.4,40.94 3.4,42.94 0.76,42.94 0.76,47.94 5.66,47.94

## Text on the board
Ref Des/Silkscreen Top: Politecnico di Torino | s287628 | ABDM ALARM
